# Altium PCB ZMDI-4-V3.PcbDoc
Units mm, origin at the board's own origin, x right, y up, seen from the top; angles counter-clockwise.
Board outline 45 x 45 mm, 2 copper layers (Top Layer, Bottom Layer), stack 1.571 mm thick; 60 components, 52 nets, 197 pads, 89 vias.
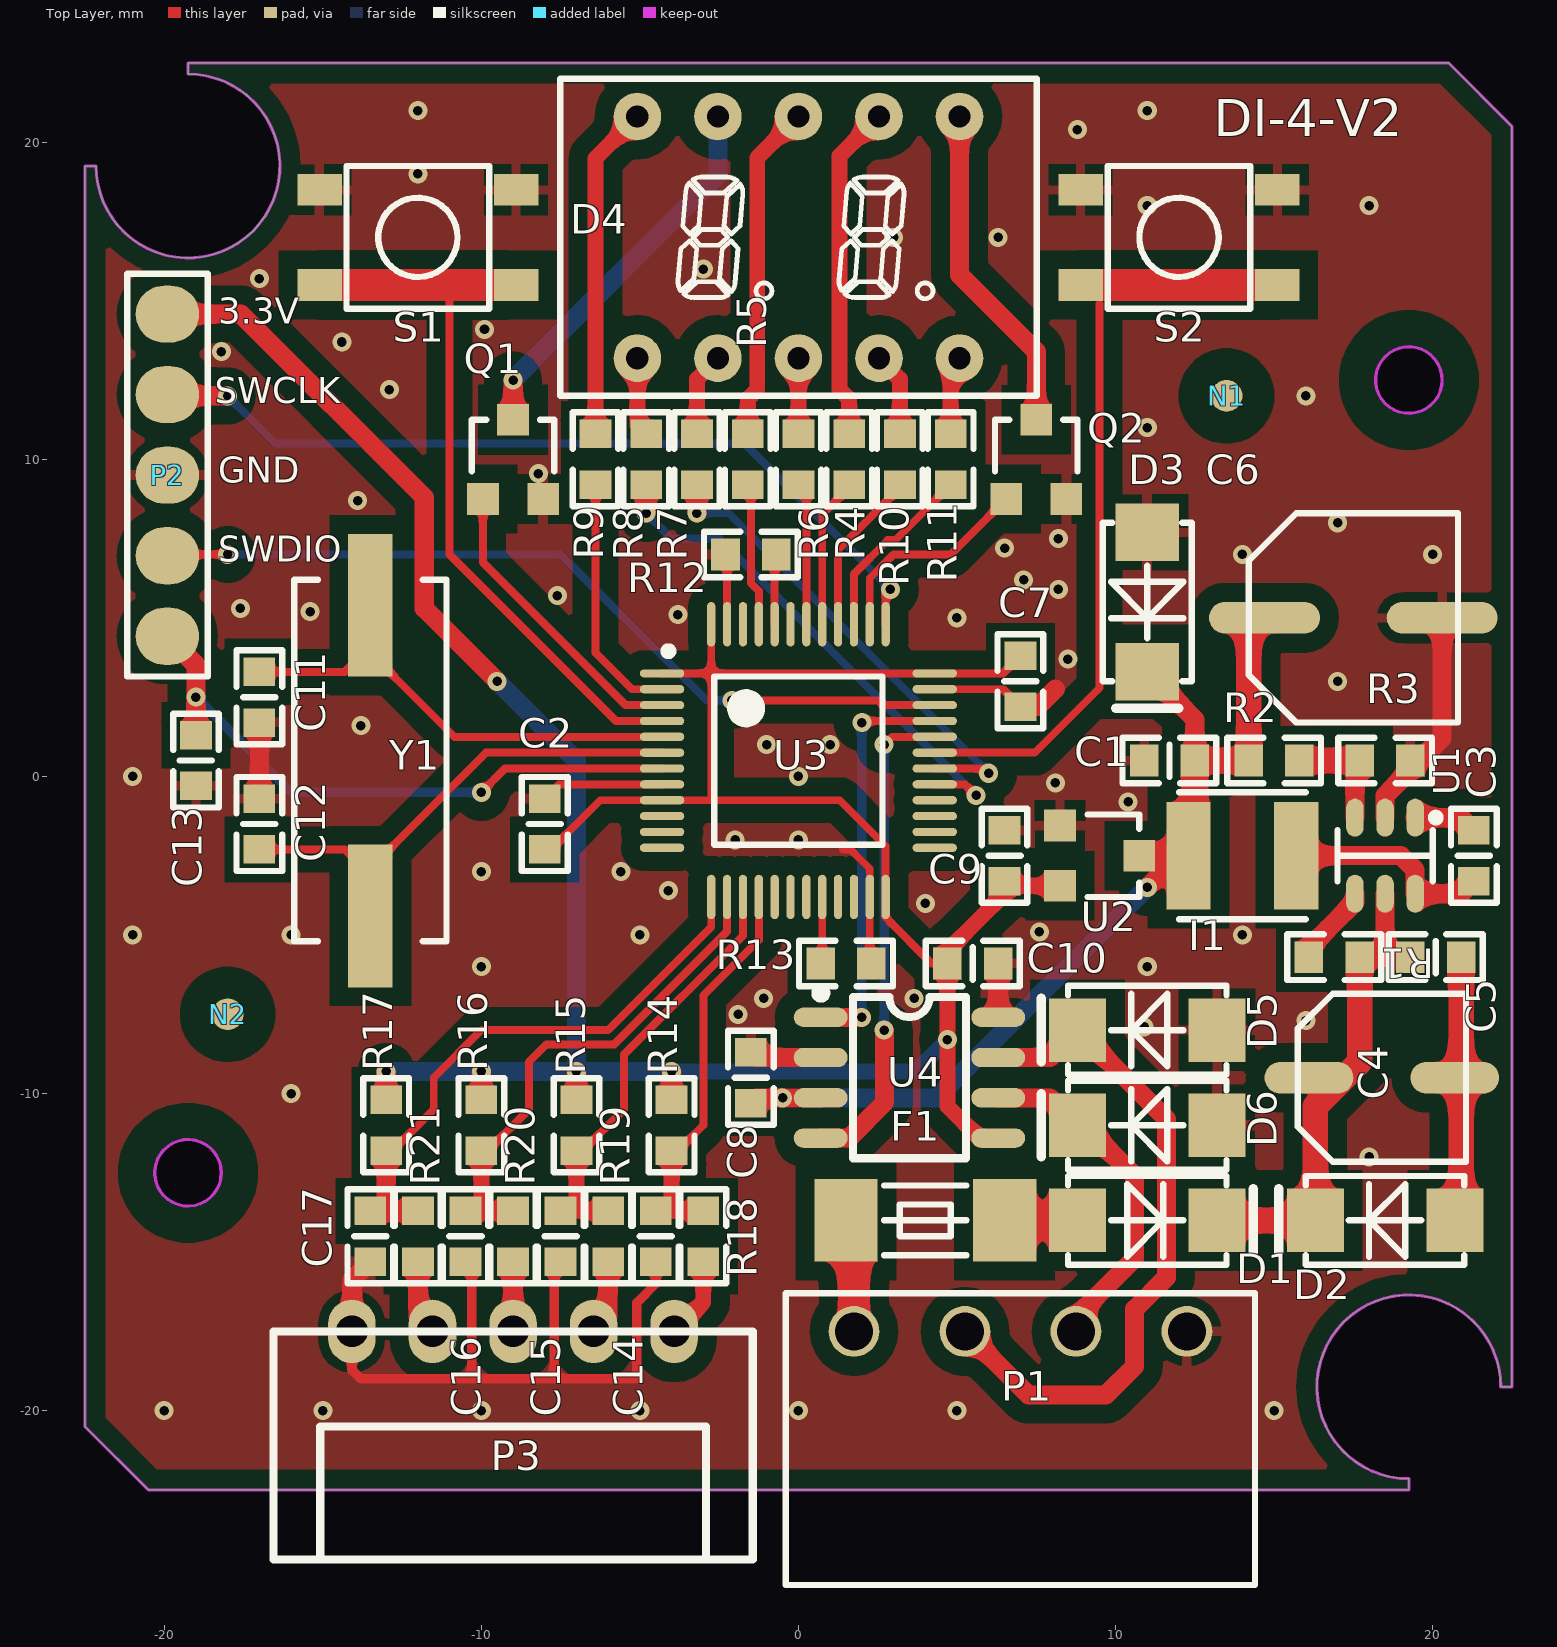
[diagram p0: Top Layer view]
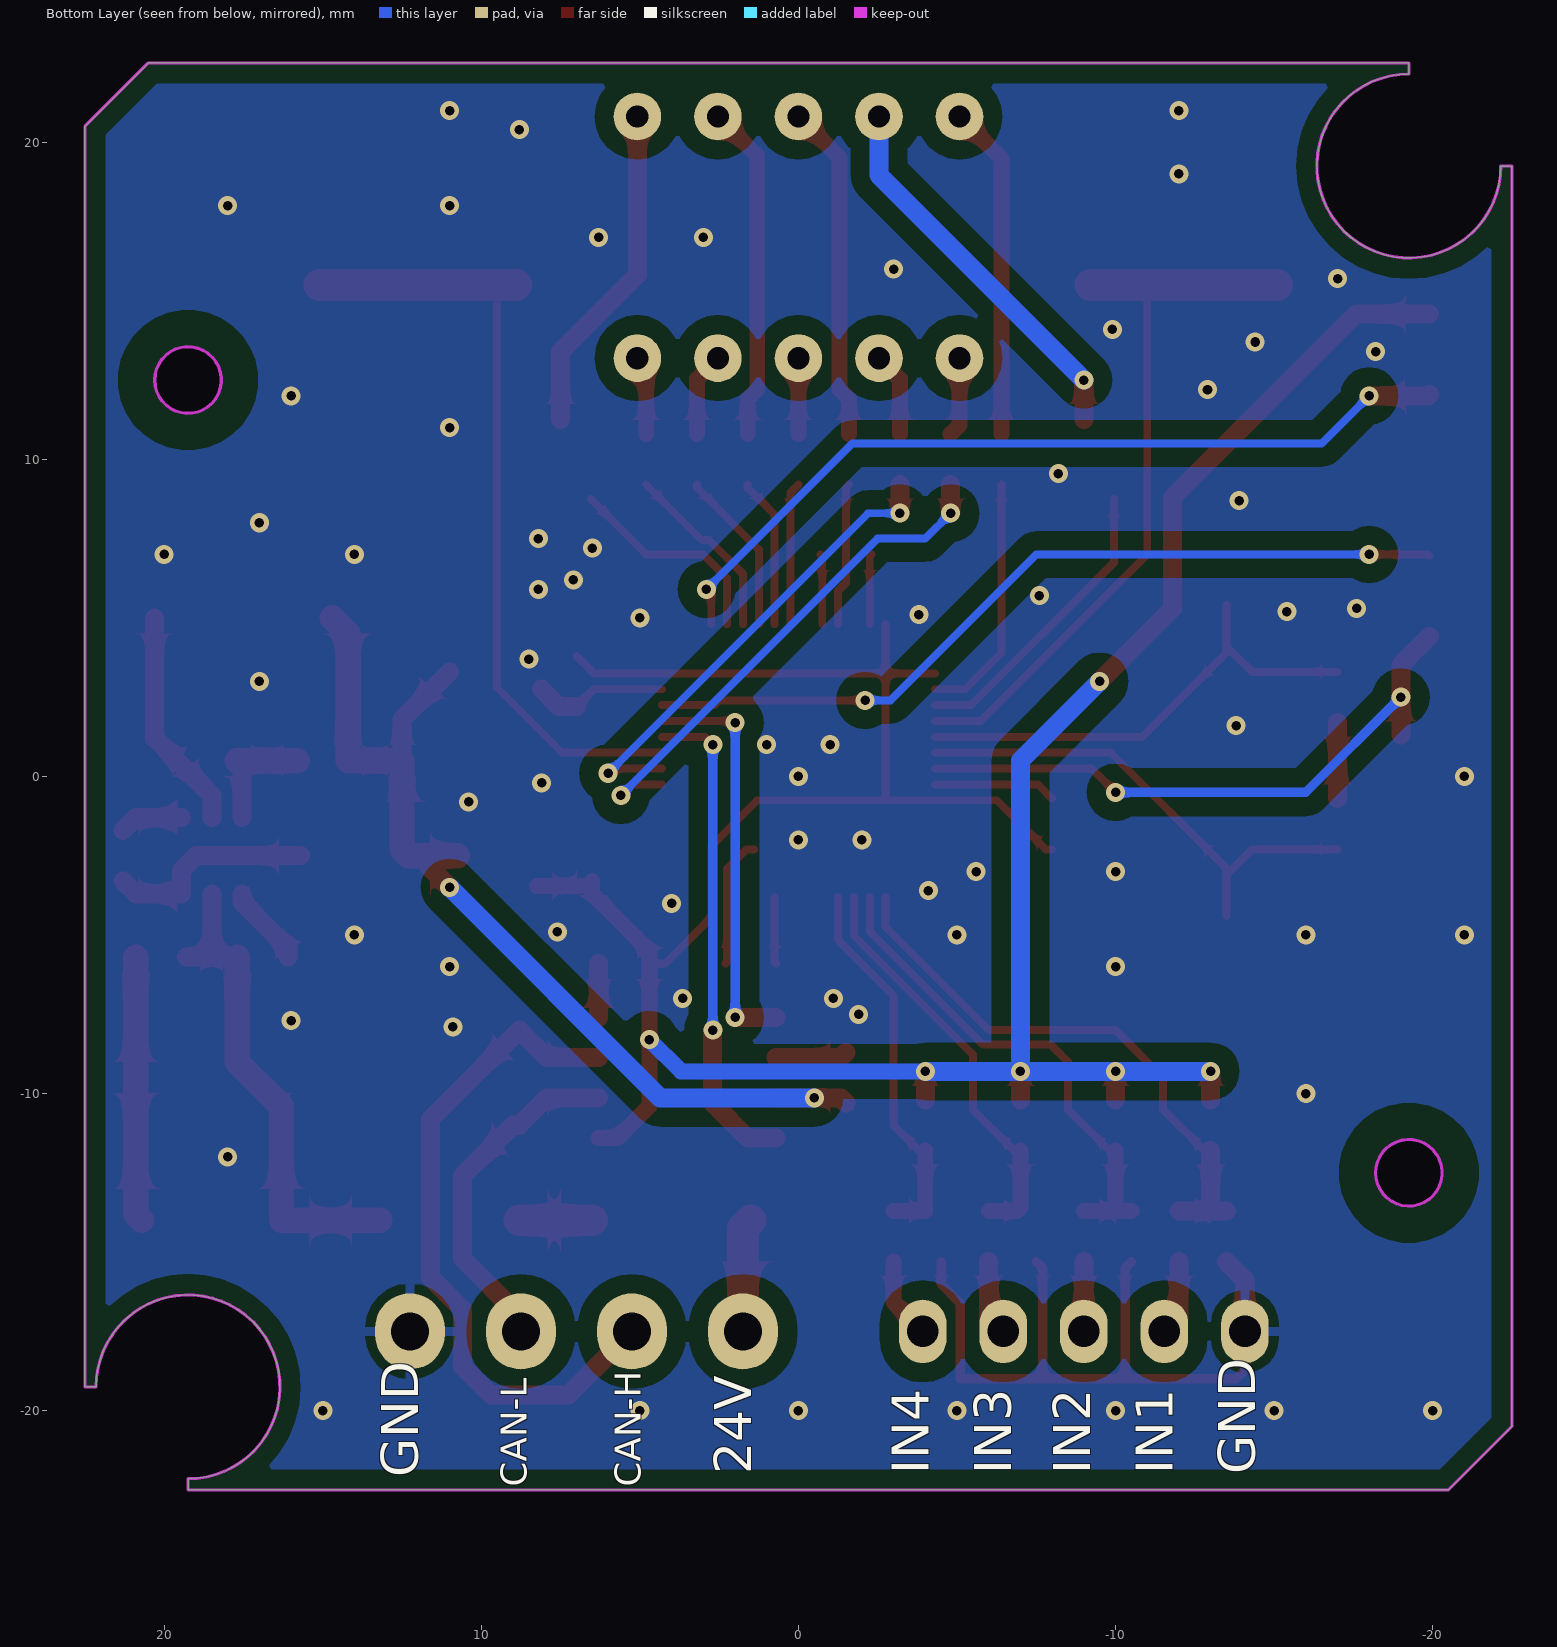
[diagram p1: Bottom Layer view, seen from below]

## Layer stack, top to bottom
Top Solder: solder mask 0.0102, Solder Resist, Dk 3.5
Top Layer: signal copper 0.0356
Dielectric1: dielectric 1.5, FR-4, Dk 4.8
Bottom Layer: signal copper 0.0356
Bottom Solder: solder mask 0.0102, Solder Resist, Dk 3.5

## Board outline
-22.5,-20.5 -22.5,19.25 -22.15,19.25 ccw(c-19.25,19.25) -19.25,22.15 -19.25,22.5 20.5,22.5 22.5,20.5 22.5,-19.25 22.15,-19.25 ccw(c19.25,-19.25) 19.25,-22.15 19.25,-22.5 -20.5,-22.5
cut-out: -20.3,-12.5 ccw(c-19.25,-12.5) -19.25,-13.55 ccw(c-19.25,-12.5) -18.2,-12.5 ccw(c-19.25,-12.5) -19.25,-11.45 ccw(c-19.25,-12.5)
cut-out: 18.2,12.5 ccw(c19.25,12.5) 19.25,11.45 ccw(c19.25,12.5) 20.3,12.5 ccw(c19.25,12.5) 19.25,13.55 ccw(c19.25,12.5)

## Design rules (kind name [scope] priority, off if disabled: settings)
Clearance Clearance敷铜间隔 [InPolygon] p1: gap=0.6
Clearance Clearance通用间隔 [All] p2: gap=0.2
PlaneConnect [All] p1: planeconnectstyle=Relief reliefexpansion=0.508 reliefentries=4 reliefconductorwidth=0.3 reliefairgap=0.3
PolygonConnect PolygonConnect_过孔 [All vs IsVia] p1: connectstyle=Direct reliefconductorwidth=0.254 reliefentries=4 polygonreliefangle="90 Angle" airgapwidth=0.254
PolygonConnect [All] p2: connectstyle=Relief reliefconductorwidth=0.3 reliefentries=4 polygonreliefangle="90 Angle" airgapwidth=0.3
RoutingVias [All] p1: holewidth=0.5 width=1 viastyle="Through Hole" minholewidth=0.4 minwidth=0.8 maxholewidth=10 maxwidth=10
SolderMaskExpansion [All] p1: expansion=0.102
Width [All] p1: maxlimit=10 minlimit=0.25 preferedwidth=0.5
29 further rules are at their usual default settings.

## Components (designator, comment, footprint, x,y, rotation, side; value= is the part's Value field where it differs from the comment)
C1 "104" C-0603 11.7,0.5 r0 top
C2 "105" C-0603 -8,-1.5 r270 top
C3 "104" C-0603 21.3,-2.5 r90 top
C4 "22UF/35V" 贴片固态电容5*5.3 18.4,-9.5 r0 top
C5 "104" C-0603 20.1,-5.7 r180 top
C6 "220UF/10V" 贴片固态电容6.3*5.3-M 17.5,5 r0 top
C7 "104" C-0603 7,3 r90 top
C8 "104" C-0603 -1.5,-9.5 r270 top
C9 "106" C-0603 6.5,-2.5 r270 top
C10 "104" C-0603 5.5,-5.9 r180 top
C11 "20P" C-0603 -17,2.5 r90 top
C12 "20P" C-0603 -17,-1.5 r270 top
C13 "104" C-0603 -19,0.5 r90 top
C14 "104" C-0603 -4.5,-14.5 r90 top
C15 "104" C-0603 -7.5,-14.5 r90 top
C16 "104" C-0603 -10.5,-14.5 r90 top
C17 "104" C-0603 -13.5,-14.5 r90 top
D1 "M7" SMA 11,-14 r180 top
D2 "SMAJ30A" SMA 18.5,-14 r0 top
D3 "SMAJ5.0A" SMA 11,5.5 r90 top
D4 "0.28英寸2位共阴绿色" 2位0.28英寸 0,17 r0 top
D5 "SMAJ5.0A" SMA 11,-8 r0 top
D6 "SMAJ5.0A" SMA 11,-11 r0 top
F1 "0.5A" FUSE-1808-N 4,-14 r0 top
I1 "100uH" SWPA4030S 14,-2.5 r180 top
N1 "光学定位点" MARK-1mm-3mm 13.5,12 r0 top
N2 "光学定位点" MARK-1mm-3mm -18,-7.5 r0 top
P1 "IN" KFEDG-3.5-4P-W 7,-17.5 r0 top
P2 "ST-LINK" 5P下载口 -19.9,9.5 r270 top
P3 "IN" XH2.54-5PD -9,-17.5 r180 top
Q1 "2N7002" SOT-23 -9,10 r270 top
Q2 "2N7002" SOT-23 7.5,10 r270 top
R1 "100K" R-0603 16.9,-5.7 r180 top
R2 "11.2K-1%" R-0603 15,0.5 r0 top
R3 "2.1K-1%" R-0603 18.5,0.5 r0 top
R4 "470" R-0603 1.6,10 r90 top
R5 "470" R-0603 -1.6,10 r90 top
R6 "470" R-0603 0,10 r90 top
R7 "470" R-0603 -3.2,10 r90 top
R8 "470" R-0603 -4.8,10 r90 top
R9 "470" R-0603 -6.4,10 r90 top
R10 "470" R-0603 3.2,10 r90 top
R11 "470" R-0603 4.8,10 r90 top
R12 "10K" R-0603 -1.5,7 r180 top
R13 "10K" R-0603 1.5,-5.9 r0 top
R14 "10K" R-0603 -4,-11 r270 top
R15 "10K" R-0603 -7,-11 r270 top
R16 "10K" R-0603 -10,-11 r270 top
R17 "10K" R-0603 -13,-11 r270 top
R18 "100" R-0603 -3,-14.5 r90 top
R19 "100" R-0603 -6,-14.5 r90 top
R20 "100" R-0603 -9,-14.5 r90 top
R21 "100" R-0603 -12,-14.5 r90 top
S1 "地址-/设置/确定" SB-4.5*4.5*9-L -12,17 r0 top
S2 "地址+/连续+" SB-4.5*4.5*9-L 12,17 r0 top
U1 "BL9341" SOT-23-6-N 18.5,-2.5 r90 top
U2 "ME6206A33M3G" SOT-23 9.5,-2.5 r180 top
U3 "GD32F103C8T6" LQFP48-L 0,0.5 r270 top
U4 "TJA1051T/3" SOP-8-N 3.5,-9.5 r270 top
Y1 "8M" HC-49SMD -13.5,0.5 r90 top

## Footprints (in the part's own frame and the unit in brackets; to place one, negate y for a bottom-side part, rotate by r counter-clockwise, add the part's x,y. Pads: shape width x height; smd on the part's side, far side on the other; paste and mask are expansions set on the pad)
2位0.28英寸 [mm]
  round 1.5 hole 0.7: 1(-5.08,-3.81) 2(-2.54,-3.81) 3(0,-3.81) 4(2.54,-3.81) 5(5.08,-3.81) 6(5.08,3.81) 7(2.54,3.81) 8(0,3.81) 9(-2.54,3.81) 10(-5.08,3.81)
  silkscreen extent -7.51,-5 7.51,5, body extent -7.51,-5 7.51,5, height 6.1
5P下载口 [mm]
  oval 1.8x2 smd paste-1: 1(-5.08,0) 2(-2.54,0) 3(0,0) 4(2.54,0) 5(5.08,0)
  silkscreen extent -6.35,-1.27 6.35,1.27
C-0603 [mm]
  rect 0.9x1 smd: 1(-0.8,0) 2(0.8,0)
  silkscreen extent -1.48,-0.72 1.48,0.72, body extent -0.8,-0.4 0.8,0.4, height 0.6
FUSE-1808-N [mm]
  rect 2x2.6 smd: 1(-2.5,0) 2(2.5,0)
  silkscreen extent -1.3,-1.1 1.3,1.1, body extent -3,-1.3 3,1.3, height 2.6
HC-49SMD [mm]
  rect 4.5x1.4 smd: 1(-4.9,0) 2(4.9,0)
  silkscreen extent -5.7,-2.4 5.7,2.4, body extent -6.7,-2.46 6.7,2.44, height 4
KFEDG-3.5-4P-W [mm]
  round 1.6 / inner round 1.6 / far side oval 2.2x2.4 hole 1.2: 1(-5.25,0) 2(-1.75,0) 3(1.75,0) 4(5.25,0)
  silkscreen extent -7.4,-8 7.4,1.2, body extent -7.7,-8 7.7,1.2, height 7.1
LQFP48-L [mm]
  oval 0.26x1.4 smd: 1(-2.75,-4.3) 2(-2.25,-4.3) 3(-1.75,-4.3) 4(-1.25,-4.3) 5(-0.75,-4.3) 6(-0.25,-4.3) 7(0.25,-4.3) 8(0.75,-4.3) 9(1.25,-4.3) 10(1.75,-4.3) 11(2.25,-4.3) 12(2.75,-4.3) 25(2.75,4.3) 26(2.25,4.3) 27(1.75,4.3) 28(1.25,4.3) 29(0.75,4.3) 30(0.25,4.3) 31(-0.25,4.3) 32(-0.75,4.3) 33(-1.25,4.3) 34(-1.75,4.3) 35(-2.25,4.3) 36(-2.75,4.3)
  oval 1.4x0.26 smd: 13(4.3,-2.75) 14(4.3,-2.25) 15(4.3,-1.75) 16(4.3,-1.25) 17(4.3,-0.75) 18(4.3,-0.25) 19(4.3,0.25) 20(4.3,0.75) 21(4.3,1.25) 22(4.3,1.75) 23(4.3,2.25) 24(4.3,2.75) 37(-4.3,2.75) 38(-4.3,2.25) 39(-4.3,1.75) 40(-4.3,1.25) 41(-4.3,0.75) 42(-4.3,0.25) 43(-4.3,-0.25) 44(-4.3,-0.75) 45(-4.3,-1.25) 46(-4.3,-1.75) 47(-4.3,-2.25) 48(-4.3,-2.75)
  silkscreen extent -3.57,-4.22 2.65,2.65, body extent -4.5,-4.5 4.5,4.5, height 1.5
MARK-1mm-3mm [mm]
  round 1 smd paste-0.6 mask+1: 1(0,0)
  Top Layer pour cut-out: -1.5,0 -1.386,-0.574 -1.061,-1.061 -0.574,-1.386 0,-1.5 0,-1.5 0.574,-1.386 1.061,-1.061 1.386,-0.574 1.5,0 1.5,0 1.386,0.574 1.061,1.061 0.574,1.386 0,1.5 0,1.5 -0.574,1.386 -1.061,1.061 -1.386,0.574 -1.5,0
R-0603 [mm]
  rect 0.9x1 smd: 1(-0.8,0) 2(0.8,0)
  silkscreen extent -1.48,-0.72 1.48,0.72, body extent -0.8,-0.4 0.8,0.4, height 0.45
SB-4.5*4.5*9-L [mm]
  rect 1.4x1 smd: 1(-3.1,1.5) 1(3.1,1.5) 2(-3.1,-1.5) 2(3.1,-1.5)
  silkscreen extent -2.25,-2.25 2.25,2.25, body extent -2.25,-2.25 2.25,2.25, height 11
SMA [mm]
  rect 1.8x2 smd: 1(2.2,0) 2(-2.2,0)
  silkscreen extent -3.35,-1.4 2.5,1.4, body extent -2.75,-1.4 2.75,1.4, height 2.6
SOP-8-N [mm]
  oval 0.61x1.7 smd: 1(-1.905,-2.8) 2(-0.635,-2.8) 3(0.635,-2.8) 4(1.905,-2.8) 5(1.905,2.8) 6(0.635,2.8) 7(-0.635,2.8) 8(-1.905,2.8)
  silkscreen extent -2.82,-2.94 2.54,1.78, body extent -2.45,-3 2.45,3, height 1.7
SOT-23 [mm]
  rect 1x1 smd: 1(1.25,-0.95) 2(1.25,0.95) 3(-1.25,0)
  silkscreen extent -1.25,-1.3 0.38,1.3, body extent -1.4,-1.45 1.4,1.45, height 1.2
SOT-23-6-N [mm]
  oval 1.2x0.55 smd: 1(1.2,-0.95) 2(1.2,0) 3(1.2,0.95) 4(-1.2,0.95) 5(-1.2,0) 6(-1.2,-0.95)
  silkscreen extent -0.8,-1.7 1.3,1.5, body extent -1.21,-1.4 1.21,1.4, height 1.08
SWPA4030S [mm]
  rect 1.4x3.4 smd: 1(-1.7,0) 2(1.7,0)
  silkscreen extent -2,-2 2,2, body extent -2,-2 2,2, height 3
XH2.54-5PD [mm]
  oval 1.5x2 hole 1: 1(-5.08,0) 2(-2.54,0) 3(0,0) 4(2.54,0) 5(5.08,0)
  silkscreen extent -7.56,0 7.56,7.2, body extent -7.53,-0.25 7.53,7.85, height 5.85
贴片固态电容5*5.3 [mm]
  oval 2.8x1 smd: 1(-2.3,0) 2(2.3,0)
  silkscreen extent -2.65,-2.65 2.65,2.65, body extent -2.95,-2.65 2.95,2.65, height 5.42
贴片固态电容6.3*5.3-M [mm]
  oval 3.5x1 smd: 1(-2.8,0) 2(2.8,0)
  silkscreen extent -3.3,-3.3 3.3,3.3, body extent -3.5,-3.3 3.5,3.3, height 5.41

## Part data
C1 C3 C5 C8 C14 C15 C16 C17: library part Cap, "Capacitor"
C2 C7 C9 C10 C11 C12 C13: library part Cap-0603, "0805"
C4 C6: library part "Cap Pol1", "Polarized Capacitor (Radial)"
D1: "SMA"
D2 D3 D5 D6: library part TVS-1, "SMB"
D4: library part 2位数码管
F1: library part "Fuse 1", "Fuse"
I1: library part Inductance3
N1 N2: library part 无引脚
P1: library part "Header 4", "Header, 4-Pin"
P2 P3: library part "Header 5", "Header, 5-Pin"
R1 R2 R3 R4 R5 R6 R7 R8 R9 R10 R11 R12 R13 R14 R15 R16 R17 R18 R19 R20 R21: library part Res2-0603, "0603"
S1 S2: library part SB-6*6*9, "SB-6*6*10"
U2: "LDO稳压 SOT-23"
Y1: library part 晶振

## Via types
v1: diameter 0.6, hole 0.3, Top Layer to Bottom Layer, tented both sides, 89 vias

## Nets (pads, with @x,y where several pads share a name; then routed paths per layer and width w, separated by ;. In a path a pad name is that pad's centre, name@x,y a point inside that pad or via, vN(x,y) a via of type N, cw(c..) or ccw(c..) an arc to the next point about the centre after c; other vN are vias at no path point)
0.8V: R2.2 R3.1 U1.3 | length 3.8
  Top Layer w0.6: U1.3 17.55,0.35 R3.1
  Top Layer w0.8: R2.2 R3.1
3.3V: C2.2 C7.2 C9.2 C10.2 P2.1 R14.1 R15.1 R16.1 R17.1 U2.2 U3.1 U3.9 U3.24 U3.36 U3.48 U4.5 | length 97.8
  Top Layer w0.25: C2.2 -7.8,-2.3 -6.25,-0.75 U3.9 1.3,-0.75 2.75,-2.2 U3.24 2.75,-4.45 4.2,-5.9 C10.2 ; U3.1 -2.75,3.25 ; -2.75,-0.7 -2.75,3.25 ; U3.48 -2.75,3.25 ; C7.2 6.45,3.25 U3.36 -2.75,3.25
  Top Layer w0.5: U4.5 5.705,-11.405 4.7,-10.4 C10.2 4.7,-5.5 6.5,-3.7 C9.2 6.65,-3.45 U2.2
  Top Layer w0.6: P2.1 -17.58,14.58 -11.8,8.8 -11.8,5.3 v1(-9.5,3) ; R17.1 v1(-13,-9.3) ; R16.1 v1(-10,-9.3) ; R15.1 v1(-7,-9.3) ; R14.1 v1(-4,-9.3)
  Bottom Layer w0.5: v1(-4,-9.3) 3.7,-9.3 v1(4.7,-8.3)
  Bottom Layer w0.6: v1(-13,-9.3) v1(-10,-9.3) v1(-7,-9.3) ; v1(-9.5,3) -7,0.5 v1(-7,-9.3) ; v1(-4,-9.3) v1(-7,-9.3)
5V: C1.2 C6.1 C8.2 D3.2 I1.2 R2.1 U2.3 U4.3 | length 32
  Top Layer w0.6: C8.2 -1.335,-10.135 v1(-0.5,-10.135) U4.3 ; v1(11,-3.5) I1.2@11.7,-2.8 ; D3.2 12.5,1.8 C1.2
  Top Layer w0.8: U2.3 I1.2 12.5,-2.3 C1.2 R2.1 14.2,4.5 C6.1
  Bottom Layer w0.6: v1(-0.5,-10.135) 4.365,-10.135 v1(11,-3.5)
24V: F1.1 P1.1 | length 3.6
  Top Layer w1: F1.1 1.75,-14.25 P1.1
A: R4.1 U3.41 | length 4.8
  Top Layer w0.25: U3.41 0.75,8.25 1.6,9.1 R4.1
B: R5.1 U3.45 | length 4.5
  Top Layer w0.25: R5.1 -1.5,9.1 -1.5,6.1 -1.25,5.85 U3.45
C: R6.1 U3.42 | length 4.5
  Top Layer w0.25: R6.1 0.25,8.95 U3.42
CAN-H: D5.2 P1.2 U4.7 | length 21.6
  Top Layer w0.6: P1.2 7.25,-19.5 9.7,-19.5 10.6,-18.6 10.6,-16.8 11.6,-15.8 11.6,-10.8 D5.2 7.935,-8.865 U4.7
CAN-L: D6.2 P1.3 U4.6 | length 11
  Top Layer w0.6: U4.6 7.935,-10.135 D6.2 9,-11 10.6,-12.6 10.6,-15.2 8.75,-17.05 P1.3
CAN-RXD: U3.32 U4.4 | length 15.5
  Top Layer w0.25: v1(2.7,1) 2.95,1.25 U3.32
  Top Layer w0.6: U4.4 1.595,-11.405 2.711,-10.289 v1@2.711,-8.011
  Bottom Layer w0.3: v1(2.7,-8) v1(2.7,1)
CAN-TXD: U3.33 U4.1 | length 12.9
  Top Layer w0.25: v1(2,1.7) 2.05,1.75 U3.33
  Top Layer w0.6: U4.1 v1(1.995,-7.595)
  Bottom Layer w0.3: v1(1.995,-7.595) v1@1.995,1.695
D: R7.1 U3.30 | length 15.2
  Top Layer w0.25: R7.1@-3.205,9.195 R7.1 ; U3.30 v1@5.95,0.25
  Top Layer w0.6: v1(-3.2,8.3) R7.1
  Bottom Layer w0.25: v1(-3.2,8.3) -2.2,8.3 v1(6,0.1)
DI1: C14.2 R14.2 R18.2 U3.16 | length 12.2
  Top Layer w0.25: R14.2 -3.8,-11.8 -3,-11 -3,-6.909 -1.25,-5.159 U3.16
  Top Layer w0.5: R14.2 -4,-13.7 R18.2
DI2: C15.2 R15.2 R19.2 U3.15 | length 13.1
  Top Layer w0.25: R15.2 -6.8,-11.8 -5.5,-10.5 -5.5,-8.773 -1.75,-5.023 U3.15
  Top Layer w0.5: R15.2 -7,-13.6 -6.9,-13.7 R19.2
DI3: C16.2 R16.2 R20.2 U3.14 | length 15.9
  Top Layer w0.25: R16.2 -9.8,-11.8 -8.5,-10.5 -8.5,-9 -7.95,-8.45 -5.814,-8.45 -2.25,-4.886 U3.14
  Top Layer w0.5: C16.2 R20.2 ; C16.2@-10,-13.6 R16.2
DI4: C17.2 R17.2 R21.2 U3.13 | length 18
  Top Layer w0.25: R17.2 -12.8,-11.8 -11.5,-10.5 -11.5,-9.5 -10,-8 -6,-8 -2.75,-4.75 U3.13
  Top Layer w0.6: C17.2 R21.2 ; -13,-13.6 R17.2
DIG1: Q1.1 U3.3 | length 9.5
  Top Layer w0.25: Q1.1 -9.95,6.75 -5.45,2.25 U3.3
DIG2: Q2.1 U3.38 | length 6.8
  Top Layer w0.25: U3.38 2.25,6.25 3,7 4.8,7 Q2.1
DP: R11.1 U3.39 | length 5.8
  Top Layer w0.25: U3.39 1.75,6.386 2.814,7.45 3.05,7.45 R11.1
E: R8.1 U3.29 | length 16.4
  Top Layer w0.25: U3.29 5.25,-0.25 v1(5.6,-0.6)
  Top Layer w0.6: v1(-4.8,8.3) R8.1
  Bottom Layer w0.25: v1(-4.8,8.3) -4,7.5 -2.5,7.5 v1(5.6,-0.6)
F: R9.1 U3.2 | length 7.9
  Top Layer w0.25: R9.1 -6.4,3.9 -5.25,2.75 U3.2
G: R10.1 U3.40 | length 5.2
  Top Layer w0.25: U3.40 1.25,7.15 3.2,9.1 R10.1
GND: C1.1 C2.1 C6.2 C7.1 C8.1 C9.1 C10.1 C11.1 C12.1 C13.1 C14.1 C15.1 C16.1 C17.1 D3.1 D5.1 D6.1 P1.4 P2.3 P3.5 Q1.2 Q2.2 R3.2 R12.2 R13.2 S1.1 S2.1 U1.2 U2.1 U3.8 U3.23 U3.35 U3.47 U4.2 U4.8 | length 52.2
  Top Layer w0.25: C2.1 -7.55,-0.25 U3.8 ; R12.2 -2.25,6.95 U3.47 ; 1.4,-2.3 1.636,-2.3 2.25,-2.914 U3.23 2.25,-5.85 R13.2 ; U3.35 6.45,2.75 C7.1
  Top Layer w0.3: P3.5@-14.08,-17.7 -14.08,-18.72 -13.8,-19 -10.3,-19 ; C16.1 -10.3,-15.5 -10.3,-19 ; C15.1 -7.7,-15.5 -7.7,-19 ; C14.1 -4.5,-16 -5.1,-16.6 -5.1,-19 -7.7,-19 ; -10.3,-19 -7.7,-19
  Top Layer w0.6: C12.1 C11.1 ; P3.5@-14.08,-17.7 P3.5 -14.08,-15.88 C17.1 ; C8.1 -1.335,-8.865 U4.2 ; U4.8 C10.1 ; C7.1 7.55,2.2 8.1,2.75 ; U1.2 18.5,-0.6 20.3,1.2 C6.2
  other v1: -20,-20 -15,-20 -10,-20 -5,-20 0,-20 5,-20 15,-20 18,-12 -16,-10 10.9,-7.9 16,-7.7 -1.9,-7.5 -1.1,-7 3.65,-7 -10,-6 11,-6 -21,-5 -16,-5 -5,-5 14,-5 7.6,-4.9 4,-4 -4.1,-3.6 -10,-3 -5.6,-3 -2,-2 0,-2 10.4,-0.8 8.1,-0.2 -21,0 0,0 -1,1 1,1 -13.8,1.6 17,3 8.5,3.7 5,5 -3.8,5.1 -15.4,5.2 -17.6,5.3 -7.6,5.7 8.2,5.9 7.1,6.2 14,7 20,7 6.5,7.2 8.2,7.5 17,8 -13.9,8.7 -8.2,9.55 11,11 16,12 -12.9,12.2 -18.2,13.4 -14.4,13.7 -9.9,14.1 -17,15.7 -3,16 3,17 6.3,17 11,18 18,18 -12,19 8.8,20.4 -12,21 11,21
NetC3_1: C3.1 I1.1 U1.6 | length 6.7
  Top Layer w0.6: I1.1 19,-2.5 19.45,-2.95 U1.6 20.9,-3.7 C3.1
NetC3_2: C3.2 U1.1 | length 2
  Top Layer w0.6: U1.1 20.9,-1.3 C3.2
NetC4_1: C4.1 C5.2 D1.2 D2.2 R1.1 U1.5 | length 15.6
  Top Layer w0.6: R1.1 C5.2 ; 18.5,-5.7 U1.5
  Top Layer w0.8: D1.2 D2.2 16.3,-10.4 17.7,-9 R1.1
NetC4_2: C4.2 C5.1 D2.1 | length 8.4
  Top Layer w0.8: D2.1 20.9,-13.8 C5.1
NetC11_2: C11.2 U3.5 Y1.2 | length 15.6
  Top Layer w0.25: C11.2 -14.3,3.3 Y1.2@-13.5,4.1 ; Y1.2 Y1.2@-13.5,4.1 ; U3.5 -10.85,1.25 -13.5,3.9 Y1.2@-13.5,4.1
NetC12_2: C12.2 U3.6 Y1.1 | length 16
  Top Layer w0.25: C12.2 -14.3,-2.3 Y1.1@-13.5,-3.1 ; Y1.1 Y1.1@-13.5,-3.1 ; U3.6 -9.85,0.75 -13.5,-2.9 Y1.1@-13.5,-3.1
NetD1_1: D1.1 F1.2 | length 2.3
  Top Layer w1: F1.2 D1.1
NetD4_1: D4.1 R8.2 | length 2.5
  Top Layer w0.5: D4.1 -5.08,11.08 R8.2
NetD4_2: D4.2 R7.2 | length 2.7
  Top Layer w0.5: R7.2 -3.2,12.53 D4.2
NetD4_3: D4.3 R6.2 | length 2.4
  Top Layer w0.5: R6.2 D4.3
NetD4_4: D4.4 R10.2 | length 2.7
  Top Layer w0.5: D4.4 3.2,12.53 R10.2
NetD4_5: D4.5 R11.2 | length 2.1
  Top Layer w0.5: R11.2 D4.5@4.8,12.91
NetD4_6: D4.6 Q2.3 | length 10.6
  Top Layer w0.6: D4.6 5.08,15.82 7.5,13.4 Q2.3
NetD4_7: D4.7 R4.2 | length 10.6
  Top Layer w0.5: R4.2 1.6,11.9 1.3,12.2 1.3,19.57 D4.7
NetD4_8: D4.8 R5.2 | length 10.7
  Top Layer w0.5: R5.2 -1.6,11.9 -1.3,12.2 -1.3,19.51 D4.8
NetD4_9: D4.9 Q1.3 | length 12.2
  Top Layer w0.6: Q1.3 v1(-9,12.5)
  Bottom Layer w0.6: v1(-9,12.5) -2.54,18.96 D4.9
NetD4_10: D4.10 R9.2 | length 10.6
  Top Layer w0.5: R9.2 -6.4,19.49 D4.10
NetP3_1: P3.1 R18.1 | length 2.6
  Top Layer w0.5: P3.1 -3,-16.58 R18.1
NetP3_2: P3.2 R19.1 | length 2.4
  Top Layer w0.6: P3.2 -6,-17.04 R19.1
NetP3_3: P3.3 R20.1 | length 2.2
  Top Layer w0.6: P3.3 R20.1
NetP3_4: P3.4 R21.1 | length 2.4
  Top Layer w0.6: R21.1 -12,-17.04 P3.4
NetR1_2: R1.2 U1.4 | length 2.6
  Top Layer w0.6: R1.2 16.1,-5.4 17.55,-3.95 U1.4
NetR12_1: R12.1 U3.44 | length 2.2
  Top Layer w0.25: U3.44 -0.75,6.95 R12.1
NetR13_1: R13.1 U3.20 | length 2.1
  Top Layer w0.25: R13.1 0.75,-5.85 U3.20
NRST: C13.2 P2.5 U3.7 | length 19.7
  Top Layer w0.25: v1(-10,-0.5) -9.25,0.25 U3.7
  Top Layer w0.6: P2.5 -19,3.52 v1(-19,2.5) C13.2
  Bottom Layer w0.3: v1(-19,2.5) -16,-0.5 v1(-10,-0.5)
SWCLK: P2.2 U3.37 | length 26.5
  Top Layer w0.25: U3.37 2.75,5.75 v1(2.9,5.9)
  Top Layer w0.6: P2.2 -19.86,12 v1(-18,12)
  Bottom Layer w0.25: v1(-18,12) -16.5,10.5 -1.7,10.5 v1(2.9,5.9)
SWDIO: P2.4 U3.34 | length 26.2
  Top Layer w0.25: P2.4 -19.86,7 v1(-18,7) ; v1(-2.1,2.4) 2.5,2.4 2.65,2.25 U3.34
  Bottom Layer w0.25: v1(-18,7) -7.5,7 -2.9,2.4 v1(-2.1,2.4)
地址+: S2.2 U3.31 | length 24.3
  Top Layer w0.25: U3.31 7.45,0.75 9.5,2.8 9.5,14.9
  Top Layer w1: S2.2@8.9,15.5 S2.2@15.1,15.5
地址-: S1.2 U3.4 | length 23.2
  Top Layer w0.25: -11,15.4 -11,7 -5.75,1.75 U3.4
  Top Layer w1: S1.2@-15.1,15.5 S1.2@-9.2,15.5
pads on no net: N1.1 N2.1 U3.10 U3.11 U3.12 U3.17 U3.18 U3.19 U3.21 U3.22 U3.25 U3.26 U3.27 U3.28 U3.43 U3.46

## Polygon pours and split planes (outlines as drawn)
GND on Top Layer "Bottom Layer-No Net" (solid, remove dead copper, pour order 0): -22.5,19.25 -19.25,22.5 20.5,22.5 22.5,20.5 22.5,-19.25 19.25,-22.5 -20.5,-22.5 -22.5,-20.5
GND on Bottom Layer "Bottom Layer-No Net" (solid, remove dead copper, pour order 2): -22.5,19.25 -19.25,22.5 20.5,22.5 22.5,20.5 22.5,-19.25 19.25,-22.5 -20.5,-22.5 -22.5,-20.5

## Keep-outs
Keep-Out Layer:
  circle w0.1: c-19.25,-12.5 r1.05
  circle w0.1: c19.25,12.5 r1.05
  lines w0.1: -22.5,-20.5 -22.5,19.25 -22.15,19.25 ccw(c-19.25,19.25) -19.25,22.15 -19.25,22.5 20.5,22.5 22.5,20.5 22.5,-19.25 22.15,-19.25 ccw(c19.25,-19.25) 19.25,-22.15 19.25,-22.5 -20.5,-22.5 -22.5,-20.5

## Other copper
Top Layer:
  pour cut-out: -21.45,-12.5 ccw(c-19.25,-12.5) -19.25,-14.7 ccw(c-19.25,-12.5) -17.05,-12.5 ccw(c-19.25,-12.5) -19.25,-10.3 ccw(c-19.25,-12.5)
  pour cut-out: 17.05,12.5 ccw(c19.25,12.5) 19.25,10.3 ccw(c19.25,12.5) 21.45,12.5 ccw(c19.25,12.5) 19.25,14.7 ccw(c19.25,12.5)
Bottom Layer:
  pour cut-out: -21.45,-12.5 ccw(c-19.25,-12.5) -19.25,-14.7 ccw(c-19.25,-12.5) -17.05,-12.5 ccw(c-19.25,-12.5) -19.25,-10.3 ccw(c-19.25,-12.5)
  pour cut-out: 17.05,12.5 ccw(c19.25,12.5) 19.25,10.3 ccw(c19.25,12.5) 21.45,12.5 ccw(c19.25,12.5) 19.25,14.7 ccw(c19.25,12.5)

## Silkscreen, mask and mechanical layers (free items; w line width, h text height)
Top Overlay:
  text "DI-4-V2" at 13.1,19.8 h2
  text "3.3V" at -18.3,14 h1.4
  text "SWCLK" at -18.4,11.5 h1.4
  text "GND" at -18.3,9 h1.4
  text "SWDIO" at -18.3,6.5 h1.4
Bottom Overlay:
  text "GND" at -14.8,-22 h2 r270
  text "IN1" at -12.2,-22 h2 r270
  text "IN2" at -9.6,-22 h2 r270
  text "IN3" at -7.1,-22 h2 r270
  text "IN4" at -4.5,-22 h2 r270
  text "24V" at 1.1,-22 h2 r270
  text "GND" at 11.6,-22.1 h2 r270
  text "CAN-H" at 4.7,-22.4 h1.4 r270
  text "CAN-L" at 8.3,-22.4 h1.4 r270
Mechanical 15:
  lines w0.2: -51.7,-91.3 36.3,-91.3 ; -51.7,-85.3 36.3,-85.3 ; -51.7,-79.3 36.3,-79.3 ; -51.7,-73.3 36.3,-73.3 ; -51.7,-67.3 36.3,-67.3 ; -51.7,-61.3 36.3,-61.3 ; -51.7,-55.3 36.3,-55.3 ; -29.7,-97.3 -29.7,-49.3 -29.7,-43.3 ; -51.7,-49.3 -51.7,-97.3 36.3,-97.3 36.3,-49.3 ; -51.7,-49.3 36.3,-49.3 ; -51.7,-49.3 -51.7,-43.3 36.3,-43.3 36.3,-49.3
  text "公司" at -50.7,-48.3 h5
  text "杭州久天科技有限公司" at -26.7,-48.3 h5
  text "工程" at -50.7,-54.3 h5
  text "设计" at -50.7,-60.3 h5
  text "邵宁鹏" at -26.7,-60.3 h5
  text "日期" at -50.7,-66.3 h5
  text "板厚" at -50.7,-72.3 h5
  text "1mm" at -26.7,-72.3 h5
  text "阻焊油" at -50.7,-78.3 h5
  text "绿色" at -26.7,-78.3 h5
  text "丝印" at -50.7,-84.3 h5
  text "白色" at -26.7,-84.3 h5
  text "板材" at -50.7,-90.3 h5
  text "FR-4" at -26.7,-90.3 h5
  text "其他" at -50.7,-96.3 h5
  text "有铅喷锡，过孔盖油" at -26.7,-96.3 h5

## Dimensions
24,-22.5 to 24,22.5 on Mechanical 15